# EAGLE board untitled (EAGLE 6.1), part 1 of 2
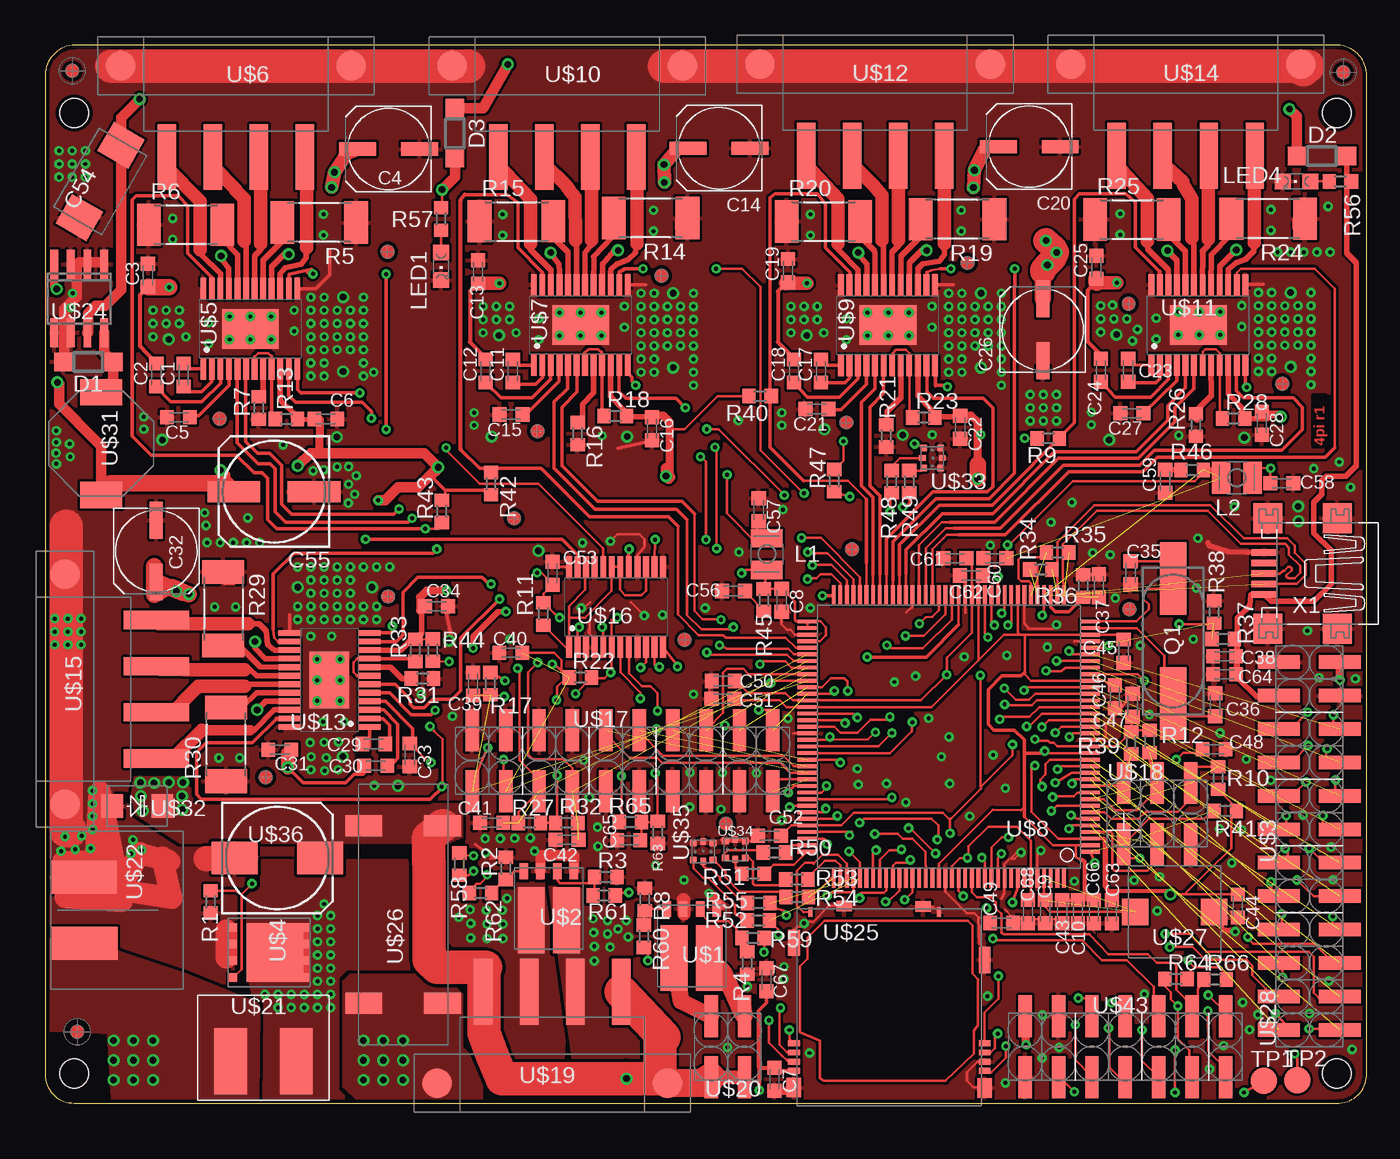
[diagram p0: board, top side]
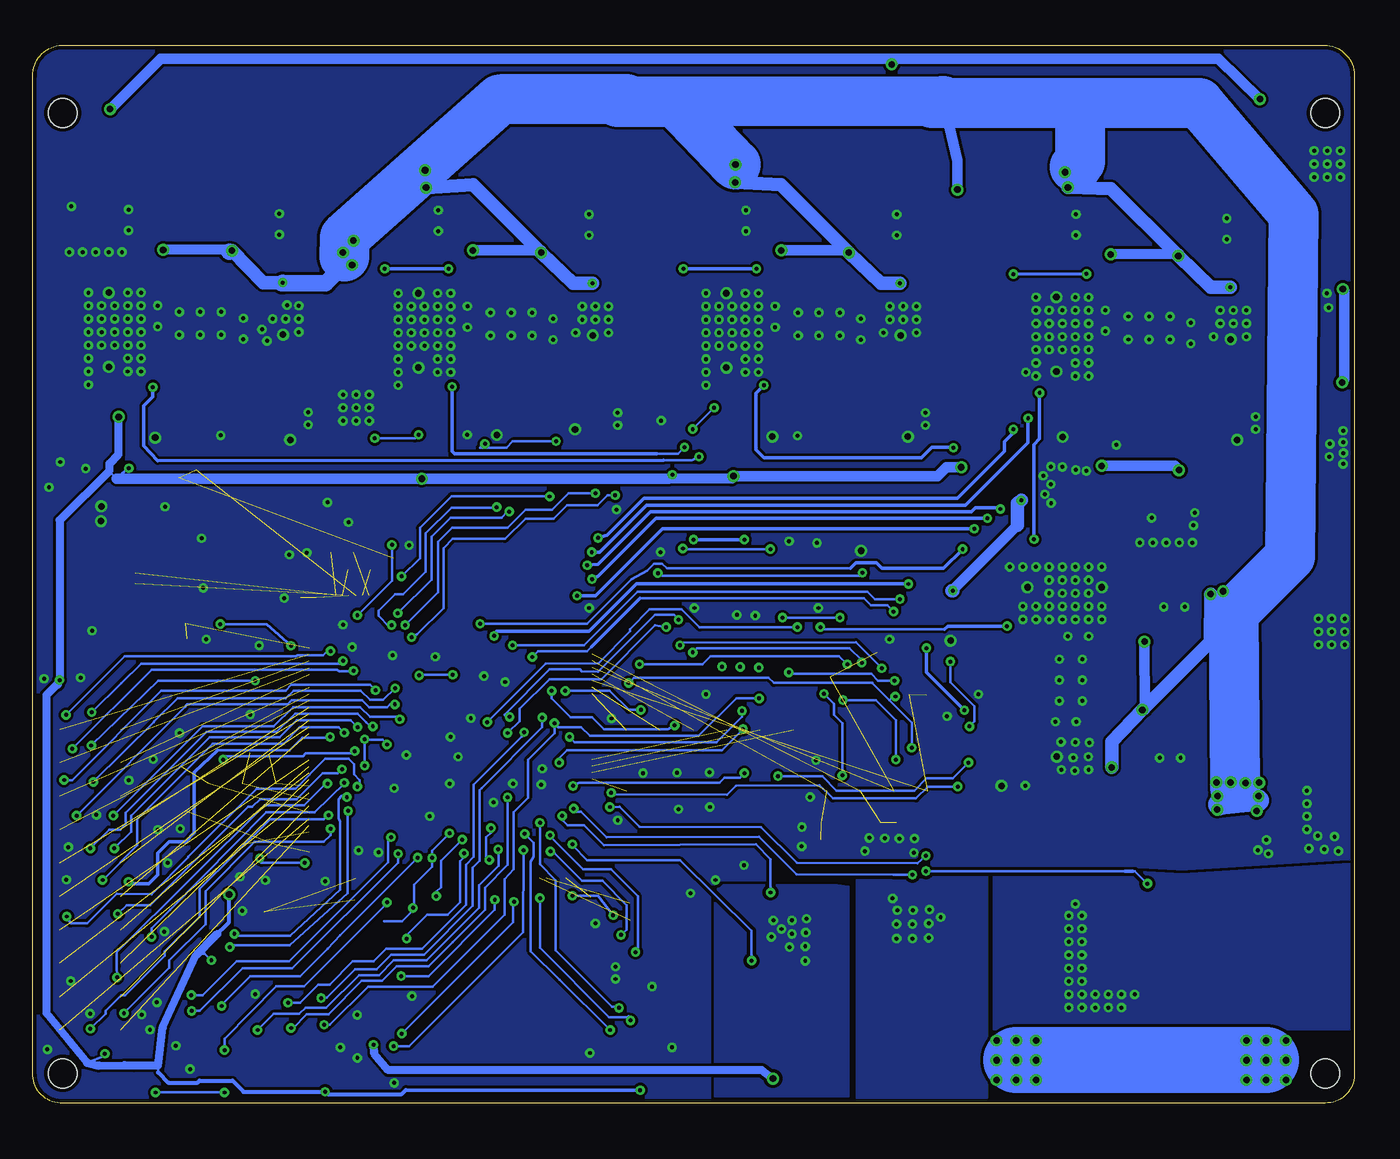
[diagram p1: board, bottom side, seen from below]

Size 100.48 x 80.4 mm. Coordinates in mm from the lower left corner, seen from the top.
Outline: 98.2,0 arc90 100.48,2.08 100.48,78.08 arc90 98.28,80.4 2.28,80.4 arc90 0,78.12 0,2.12 arc90 2.2,0 98.2,0
Copper layers (1*16): Top 0.07mm / dielectric 1.5mm / Bottom 0.07mm
Design rules: minimum track width 8mil, minimum drill 0.3mm, track to track 8mil, track to pad 8mil, pad to pad 8mil, via to via 8mil, smd to smd 0mil, copper to edge 12mil, drill to drill 10mil, minimum pad ring 8mil, minimum via ring 8mil, stop-mask expansion 1.5mil, vias tented up to drill 25mil, thermal gap 8mil
Holes 2.2 mm at 98.2,2.25 2.2,75.25 98.2,75.25 2.2,2.25

## Footprints (pad centres in the part's own frame; a part is rotated, then mirrored left to right if it is on the bottom)
C0603K = smd 1.05 x 1.08: 1 -0.875,0; 2 0.875,0
UD-6,3X7,7_NICHICON = smd 2.8 x 1: + 2.35,0; - -2.35,0
D/7343-31R = smd 2.55 x 2.7: + 3.175,0; - -3.175,0
153CLV-0807 = smd 4 x 1.6: + 3.05,0; - -3.05,0
SOD123 = smd 1.4 x 1.4: A 1.9,0; C -1.9,0
L2825P = smd 1.4 x 2.4: 1 -1.2,0; 2 1.2,0
CHIPLED_0805 = smd 1.2 x 1.2: A 0,-1.05; C 0,1.05
CSM-7X-DU = smd 5.5 x 2: 1 -4.75,0; 2 4.75,0
R0603 = smd 1 x 1.1: 1 -0.85,0; 2 0.85,0
R2512 = smd 1.8 x 3.2: 1 -2.8,0; 2 2.8,0
TP20R = smd 2 x 2: TP 0,0
SUPERSO8 = smd 2.035 x 5: MF1D -1.335,0.91; MF2D 1.335,0.91 | smd 0.65 x 1.2: MF1G -0.645,-2.825; MF1S -1.905,-2.825; MF2G 1.905,-2.825; MF2S 0.645,-2.825
SMD0.1X20 = smd 1.02 x 3.18: P$1 -11.43,2.32; P$2 -11.43,-2.32; P$3 -8.89,2.32; P$4 -8.89,-2.32; P$5 -6.35,2.32; P$6 -6.35,-2.32; P$7 -3.81,2.32; P$8 -3.81,-2.32; P$9 -1.27,2.32; P$10 -1.27,-2.32; P$11 1.27,2.32; P$12 1.27,-2.32; P$13 3.81,2.32; P$14 3.81,-2.32; P$15 6.35,2.32; P$16 6.35,-2.32; P$17 8.89,2.32; P$18 8.89,-2.32; P$19 11.43,2.32; P$20 11.43,-2.32
PQFNFET = smd 4.46 x 4.27: D 0,0.44 | smd 0.65 x 0.65: D1 -1.9,2.75; D2 -0.63,2.75; D3 0.63,2.75; D4 1.9,2.75; G 1.9,-2.75; S1 -1.9,-2.75; S2 -0.63,-2.75; S3 0.63,-2.75
ETSSOP24 = smd 3 x 4.32: EPAD 0,0 | smd 1.635 x 0.44: P01 -3.05,3.575; P02 -3.05,2.925; P03 -3.05,2.275; P04 -3.05,1.625; P05 -3.05,0.975; P06 -3.05,0.325; P07 -3.05,-0.325; P08 -3.05,-0.975; P09 -3.05,-1.625; P10 -3.05,-2.275; P11 -3.05,-2.925; P12 -3.05,-3.575; P13 3.05,-3.575; P14 3.05,-2.925; P15 3.05,-2.275; P16 3.05,-1.625; P17 3.05,-0.975; P18 3.05,-0.325; P19 3.05,0.325; P20 3.05,0.975; P21 3.05,1.625; P22 3.05,2.275; P23 3.05,2.925; P24 3.05,3.575
210-A-126-SMD-4 = smd 2.25 x 2.25: GND0 -8.75,0; GND1 8.75,0 | smd 1.4 x 5: P1 5.25,6.95; P2 1.75,6.95; P3 -1.75,6.95; P4 -5.25,6.95
LQFP144 = smd 1.5 x 0.29: P$1 -10.75,8.75; P$2 -10.75,8.25; P$3 -10.75,7.75; P$4 -10.75,7.25; P$5 -10.75,6.75; P$6 -10.75,6.25; P$7 -10.75,5.75; P$8 -10.75,5.25; P$9 -10.75,4.75; P$10 -10.75,4.25; P$11 -10.75,3.75; P$12 -10.75,3.25; P$13 -10.75,2.75; P$14 -10.75,2.25; P$15 -10.75,1.75; P$16 -10.75,1.25; P$17 -10.75,0.75; P$18 -10.75,0.25; P$19 -10.75,-0.25; P$20 -10.75,-0.75; P$21 -10.75,-1.25; P$22 -10.75,-1.75; P$23 -10.75,-2.25; P$24 -10.75,-2.75; P$25 -10.75,-3.25; P$26 -10.75,-3.75; P$27 -10.75,-4.25; P$28 -10.75,-4.75; P$29 -10.75,-5.25; P$30 -10.75,-5.75; P$31 -10.75,-6.25; P$32 -10.75,-6.75; P$33 -10.75,-7.25; P$34 -10.75,-7.75; P$35 -10.75,-8.25; P$36 -10.75,-8.75; P$73 10.75,-8.75; P$74 10.75,-8.25; P$75 10.75,-7.75; P$76 10.75,-7.25; P$77 10.75,-6.75; P$78 10.75,-6.25; P$79 10.75,-5.75; P$80 10.75,-5.25; P$81 10.75,-4.75; P$82 10.75,-4.25; P$83 10.75,-3.75; P$84 10.75,-3.25; P$85 10.75,-2.75; P$86 10.75,-2.25; P$87 10.75,-1.75; P$88 10.75,-1.25; P$89 10.75,-0.75; P$90 10.75,-0.25; P$91 10.75,0.25; P$92 10.75,0.75; P$93 10.75,1.25; P$94 10.75,1.75; P$95 10.75,2.25; P$96 10.75,2.75; P$97 10.75,3.25; P$98 10.75,3.75; P$99 10.75,4.25; P$100 10.75,4.75; P$101 10.75,5.25; P$102 10.75,5.75; P$103 10.75,6.25; P$104 10.75,6.75; P$105 10.75,7.25; P$106 10.75,7.75; P$107 10.75,8.25; P$108 10.75,8.75 | smd 0.29 x 1.5: P$37 -8.75,-10.75; P$38 -8.25,-10.75; P$39 -7.75,-10.75; P$40 -7.25,-10.75; P$41 -6.75,-10.75; P$42 -6.25,-10.75; P$43 -5.75,-10.75; P$44 -5.25,-10.75; P$45 -4.75,-10.75; P$46 -4.25,-10.75; P$47 -3.75,-10.75; P$48 -3.25,-10.75; P$49 -2.75,-10.75; P$50 -2.25,-10.75; P$51 -1.75,-10.75; P$52 -1.25,-10.75; P$53 -0.75,-10.75; P$54 -0.25,-10.75; P$55 0.25,-10.75; P$56 0.75,-10.75; P$57 1.25,-10.75; P$58 1.75,-10.75; P$59 2.25,-10.75; P$60 2.75,-10.75; P$61 3.25,-10.75; P$62 3.75,-10.75; P$63 4.25,-10.75; P$64 4.75,-10.75; P$65 5.25,-10.75; P$66 5.75,-10.75; P$67 6.25,-10.75; P$68 6.75,-10.75; P$69 7.25,-10.75; P$70 7.75,-10.75; P$71 8.25,-10.75; P$72 8.75,-10.75; P$109 8.75,10.75; P$110 8.25,10.75; P$111 7.75,10.75; P$112 7.25,10.75; P$113 6.75,10.75; P$114 6.25,10.75; P$115 5.75,10.75; P$116 5.25,10.75; P$117 4.75,10.75; P$118 4.25,10.75; P$119 3.75,10.75; P$120 3.25,10.75; P$121 2.75,10.75; P$122 2.25,10.75; P$123 1.75,10.75; P$124 1.25,10.75; P$125 0.75,10.75; P$126 0.25,10.75; P$127 -0.25,10.75; P$128 -0.75,10.75; P$129 -1.25,10.75; P$130 -1.75,10.75; P$131 -2.25,10.75; P$132 -2.75,10.75; P$133 -3.25,10.75; P$134 -3.75,10.75; P$135 -4.25,10.75; P$136 -4.75,10.75; P$137 -5.25,10.75; P$138 -5.75,10.75; P$139 -6.25,10.75; P$140 -6.75,10.75; P$141 -7.25,10.75; P$142 -7.75,10.75; P$143 -8.25,10.75; P$144 -8.75,10.75
TSSOP24 = smd 1.635 x 0.44: P01 -3.05,3.575; P02 -3.05,2.925; P03 -3.05,2.275; P04 -3.05,1.625; P05 -3.05,0.975; P06 -3.05,0.325; P07 -3.05,-0.325; P08 -3.05,-0.975; P09 -3.05,-1.625; P10 -3.05,-2.275; P11 -3.05,-2.925; P12 -3.05,-3.575; P13 3.05,-3.575; P14 3.05,-2.925; P15 3.05,-2.275; P16 3.05,-1.625; P17 3.05,-0.975; P18 3.05,-0.325; P19 3.05,0.325; P20 3.05,0.975; P21 3.05,1.625; P22 3.05,2.275; P23 3.05,2.925; P24 3.05,3.575
SMD0.1X6 = smd 1.02 x 3.18: P1 -2.54,-2.32; P2 -2.54,2.32; P3 0,-2.32; P4 0,2.32; P5 2.54,-2.32; P6 2.54,2.32
SMD0.1 = smd 1.02 x 3.18: P$1 -1.27,2.32; P$2 -1.27,-2.32; P$3 1.27,2.32; P$4 1.27,-2.32
950-D-SMD-2 = smd 2.5 x 5: P$1 -2.5,-1.02; P$2 2.5,-1.02
974-D-SMD-2 = smd 2.5 x 5: P$1 -2.5,-4.45; P$2 2.5,-4.4
SO08 = smd 0.6 x 2.2: 1 -1.905,-2.6; 2 -0.635,-2.6; 3 0.635,-2.6; 4 1.905,-2.6; 5 1.905,2.6; 6 0.635,2.6; 7 -0.635,2.6; 8 -1.905,2.6
SDCARD = smd 0.3 x 0.7: CD -5.975,7.25; COM 3.775,7.25 | smd 0.9 x 0.45: CLK 7.25,-4.835; CMD -7.25,-4.135; DAT0 7.25,-3.435; DAT1 7.25,-2.74; DAT2 -7.25,-2.735; DAT3 -7.25,-3.435; VDD -7.25,-4.835; VSS 7.25,-4.135 | smd 1.1 x 1.5: GND0 7.25,-6.125; GND5 -7.25,-6.1 | smd 0.9 x 2: GND1 7.25,3.6; GND4 -7.25,4.9 | smd 1.2 x 0.8: GND2 2.575,7.65; GND3 -3.425,7.7
FUSEHOLDER = smd 1.6 x 2.8: I0 -6.75,-3; I1 -6.75,3; OUT0 6.75,-3; OUT1 6.75,3
BUTTON = smd 2 x 2: P$1 -3,0; P$2 3,0
INDUCTOR = smd 2 x 3.2: P$1 -3.9,0; P$2 3.9,0
SMX = smd 1.651 x 1.778: P$1 -1.905,0; P$2 1.905,0
OMRONLED = smd 0.5 x 0.5: P1 -0.75,-0.65; P3 0.75,-0.65; P4 0.75,0.65; P6 -0.75,0.65 | smd 0.4 x 0.5: P2 0,-0.75; P5 0,0.75
153CLV-0810 = smd 3.5 x 2.5: + 3.25,0; - -3.25,0
SMD0.1X14 = smd 1.02 x 3.18: P$1 -7.62,2.32; P$2 -7.62,-2.32; P$3 -5.08,2.32; P$4 -5.08,-2.32; P$5 -2.54,2.32; P$6 -2.54,-2.32; P$7 0,2.32; P$8 0,-2.32; P$9 2.54,2.32; P$10 2.54,-2.32; P$11 5.08,2.32; P$12 5.08,-2.32; P$13 7.62,2.32; P$14 7.62,-2.32
USBC = smd 2 x 0.5: 1 3,1.6; 2 3,0.8; 3 3,0; 4 3,-0.8; 5 3,-1.6 | smd 2.2 x 2.3: M1 -2.55,-4.2; M2 -2.55,4.2; M3 2.75,4.2; M4 2.75,-4.2

## Placement (x,y rotation side)
C1  100n  [C0603K]  10.52,55.34 90 top
C2  100n  [C0603K]  8.46,55.34 90 top
C3  100n  [C0603K]  7.82,62.93 90 top
C4  100u  [UD-6,3X7,7_NICHICON]  26.11,72.51 180 top
C5  220n  [C0603K]  10.13,52.13 180 top
C6  220n  [C0603K]  21.33,51.99 0 top
C7  100n  [C0603K]  55.45,1.8 270 top
C8  100n  [C0603K]  56,38.23 270 top
C9  10n  [C0603K]  76.03,14.55 90 top
C10  4.7u  [C0603K]  78.53,14.55 270 top
C11  100n  [C0603K]  35.56,55.64 90 top
C12  100n  [C0603K]  33.49,55.64 90 top
C13  100n  [C0603K]  32.9,63.17 90 top
C14  100u  [UD-6,3X7,7_NICHICON]  51.23,72.57 180 top
C15  220n  [C0603K]  35.42,52.33 180 top
C16  220n  [C0603K]  46.13,51.25 270 top
C17  100n  [C0603K]  58.99,55.64 90 top
C18  100n  [C0603K]  56.93,55.64 90 top
C19  100n  [C0603K]  56.47,63.27 90 top
C20  100u  [UD-6,3X7,7_NICHICON]  74.82,72.69 180 top
C21  220n  [C0603K]  58.68,52.75 180 top
C22  220n  [C0603K]  69.57,51.37 270 top
C23  100n  [C0603K]  82.34,55.69 90 top
C24  100n  [C0603K]  80.28,55.69 90 top
C25  100n  [C0603K]  79.92,63.52 90 top
C26  100u  [UD-6,3X7,7_NICHICON]  75.85,58.78 90 top
C27  220n  [C0603K]  82.62,52.44 180 top
C28  220n  [C0603K]  92.5,51.67 270 top
C29  100n  [C0603K]  24.98,27.29 180 top
C30  100n  [C0603K]  25.13,25.62 180 top
C31  100n  [C0603K]  17.84,26.86 180 top
C32  100u  [UD-6,3X7,7_NICHICON]  8.45,41.95 270 top
C33  220n  [C0603K]  27.72,26.45 270 top
C34  220n  [C0603K]  29.76,37.75 0 top
C35  20p  [C0603K]  82.52,40.3 270 top
C36  20p  [C0603K]  88.95,30.27 90 top
C37  10p  [C0603K]  80.12,39.33 90 top
C38  10p  [C0603K]  89.67,33.95 180 top
C39  10u  [C0603K]  32.53,31.85 90 top
C40  10u  [C0603K]  35.41,34.22 180 top
C41  10u  [C0603K]  33.95,21.3 180 top
C42  10u  [C0603K]  39.68,20 180 top
C43  100n  [C0603K]  77.33,14.55 270 top
C44  100n  [C0603K]  90.67,14.97 270 top
C45  100n  [C0603K]  82,34.35 270 top
C46  100n  [C0603K]  81.33,30.88 90 top
C47  100n  [C0603K]  82.67,30.23 270 top
C48  100n  [C0603K]  88.88,26.9 180 top
C49  100n  [C0603K]  72.73,13.68 0 top
C50  100n  [C0603K]  51.55,32.08 180 top
C51  100n  [C0603K]  51.53,30.73 180 top
C52  100n  [C0603K]  55.08,20.32 0 top
C53  100n  [C0603K]  38.58,40.27 270 top
C54  47u  [D/7343-31R]  4.19,70.05 60 top
C55  120uf  [153CLV-0807]  17.4,46.48 180 top
C56  4.7u  [C0603K]  52.33,38.92 0 top
C57  10u  [C0603K]  54.25,45.1 270 top
C58  10u  [C0603K]  94.03,47.1 180 top
C59  4.7u  [C0603K]  85.15,47.25 90 top
C60  100n  [C0603K]  72.2,41.4 180 top
C61  100n  [C0603K]  69.17,41.4 180 top
C62  100n  [C0603K]  70.42,40.1 180 top
C63  10u  [C0603K]  81.1,14.53 270 top
C64  4.7u  [C0603K]  89.67,32.6 0 top
C65  10p  [C0603K]  44.38,19.98 0 top
C66  10u  [C0603K]  79.73,14.55 270 top
C67  10u  [C0603K]  54.85,9.38 90 top
C68  100n  [C0603K]  74.73,14.55 270 top
D1  1N5819HW  [SOD123]  3.28,56.33 180 top
D2  1N5819HW  [SOD123]  97.08,71.97 0 top
D3  1N5819HW  [SOD123]  31.15,73.72 270 top
L1  10u  [L2825P]  54.88,41.73 90 top
L2  10u  [L2825P]  90.6,47.52 180 top
LED1  [CHIPLED_0805]  30.1,63.6 180 top
LED4  [CHIPLED_0805]  95.15,70.05 90 top
Q1  [CSM-7X-DU]  85.75,35.12 90 top
R1  33k  [R0603]  12.58,15.29 270 top
R2  33k  [R0603]  35.03,17.84 90 top
R3  33k  [R0603]  42.62,17.18 0 top
R4  33k  [R0603]  53.38,10.64 270 top
R5  0.05r  [R2512]  20.84,66.93 180 top
R6  0.05r  [R2512]  10.68,66.77 0 top
R7  0R  [R0603]  16.24,52.83 270 top
R8  33k  [R0603]  45.6,15.47 270 top
R9  100k  [R0603]  76.28,50.52 180 top
R10  100k  [R0603]  89.17,24.7 270 top
R11  33k  [R0603]  37.88,37.17 270 top
R12  100k  [R0603]  83.98,27.48 90 top
R13  100k  [R0603]  18.35,51.99 0 top
R14  0.05r  [R2512]  46.04,67.27 180 top
R15  0.05r  [R2512]  35.83,67.01 0 top
R16  0R  [R0603]  40.48,50.87 270 top
R17  4.7k  [R0603]  33.85,31.88 90 top
R18  100k  [R0603]  43.35,52.23 0 top
R19  0.05r  [R2512]  69.38,67.17 180 top
R20  0.05r  [R2512]  59.17,67.01 0 top
R21  0R  [R0603]  63.96,50.71 270 top
R22  4.7k  [R0603]  40.7,32.35 0 top
R23  100k  [R0603]  66.81,52.11 0 top
R24  0.05r  [R2512]  92.98,67.22 180 top
R25  0.05r  [R2512]  82.62,67.16 0 top
R26  0R  [R0603]  87.49,51.53 270 top
R27  4.7k  [R0603]  36.83,21.3 0 top
R28  100k  [R0603]  90.36,52.02 0 top
R29  0.05r  [R2512]  13.54,37.57 270 top
R30  0.05r  [R2512]  13.75,27.25 90 top
R31  0R  [R0603]  28.69,32.26 0 top
R32  4.7k  [R0603]  39.65,21.3 180 top
R33  100k  [R0603]  28.13,34.41 90 top
R34  39R  [R0603]  75.7,40.55 0 top
R35  39R  [R0603]  76.98,41.85 0 top
R36  6.8k  [R0603]  78.92,39.3 90 top
R37  47k  [R0603]  89.58,35.27 0 top
R38  68k  [R0603]  88.88,37.33 270 top
R39  100k  [R0603]  82.55,27.38 270 top
R40  100k  [R0603]  54.35,53.73 180 top
R41  100k  [R0603]  89.73,22.2 0 top
R42  100k  [R0603]  33.9,47.08 270 top
R43  100k  [R0603]  30.15,44.98 90 top
R44  100k  [R0603]  29.47,34.42 270 top
R45  1r  [R0603]  54.65,38.23 90 top
R46  1r  [R0603]  87.2,48.12 0 top
R47  1k  [R0603]  60,47.3 90 top
R48  1k  [R0603]  64.35,47.23 90 top
R49  1k  [R0603]  65.7,47.23 90 top
R50  1k  [R0603]  55.45,19.02 0 top
R51  1k  [R0603]  53.83,17.43 0 top
R52  1k  [R0603]  54.23,13.88 0 top
R53  1k  [R0603]  57.15,16.98 0 top
R54  1k  [R0603]  57.18,15.65 0 top
R55  1k  [R0603]  54.25,15.2 0 top
R56  1k  [R0603]  98.48,70.05 180 top
R57  4.7k  [R0603]  30.1,67.2 270 top
R58  1k  [R0603]  31.5,18.15 90 top
R59  220r  [R0603]  53.83,12.55 180 top
R60  220r  [R0603]  45.53,12.68 270 top
R61  220r  [R0603]  42.5,15.78 0 top
R62  220r  [R0603]  33.1,15.97 180 top
R63  33k  [R0603]  46.58,20.57 90 top
R64  4.7k  [R0603]  85.98,9.43 0 top
R65  100k  [R0603]  44.5,21.35 0 top
R66  4.7k  [R0603]  88.95,9.4 0 top
TP1  TPTP20R  [TP20R]  92.65,1.68 0 top
TP2  TPTP20R  [TP20R]  95.2,1.73 0 top
U$1  IPG20N04S4L-11  [SUPERSO8]  49.15,11.93 180 top
U$2  IPG20N04S4L-11  [SUPERSO8]  38.3,14.8 180 top
U$3  SMD.1X20  [SMD0.1X20]  96.12,22.07 90 top
U$4  IRFH6200  [PQFNFET]  17.02,11.45 270 top
U$5  A4982  [ETSSOP24]  15.6,58.85 90 top
U$6  210-A-126-SMD  [210-A-126-SMD-4]  14.5,78.85 180 top
U$7  A4982  [ETSSOP24]  40.72,59.14 90 top
U$8  SAM3U4E  [LQFP144]  68.7,27.85 180 top
U$9  A4982  [ETSSOP24]  64.07,59.12 90 top
U$10  210-A-126-SMD  [210-A-126-SMD-4]  39.7,78.85 180 top
U$11  A4982  [ETSSOP24]  87.67,59.13 90 top
U$12  210-A-126-SMD  [210-A-126-SMD-4]  63.1,78.95 180 top
U$13  A4982  [ETSSOP24]  21.62,32.16 180 top
U$14  210-A-126-SMD  [210-A-126-SMD-4]  86.73,78.95 180 top
U$15  210-A-126-SMD  [210-A-126-SMD-4]  1.5,31.45 270 top
U$16  AD5206  [TSSOP24]  43.4,37.7 90 top
U$17  SMD.1X20  [SMD0.1X20]  43.9,26.02 0 top
U$18  SMD.1X6  [SMD0.1X6]  84.55,22 0 top
U$19  210-A-126-SMD  [210-A-126-SMD-4]  38.55,1.5 0 top
U$20  SMD.1  [SMD0.1]  51.9,4.28 180 top
U$21  950-D-SMD-DS-2  [950-D-SMD-2]  16.6,4.2 0 top
U$22  974-D-SMD-2  [974-D-SMD-2]  7.4,14.65 270 top
U$23  GFUD  [FIDUCIAL_G10]  2.43,5.42 0 top
U$24  LM2594  [SO08]  2.58,61.15 180 top
U$25  SDCARD  [SDCARD]  64.17,7.28 0 top
U$26  FUSE  [FUSEHOLDER]  27.22,14.32 90 top
U$27  BUTTON  [BUTTON]  85.88,14.53 180 top
U$28  SMD.1  [SMD0.1]  96.12,6.83 90 top
U$29  GFUD  [FIDUCIAL_G10]  2.05,78.45 0 top
U$30  GFUD  [FIDUCIAL_G10]  98.7,78.35 0 top
U$31  100uH  [INDUCTOR]  4.25,50.12 270 top
U$32  FM4004  [SMX]  7,22.57 180 top
U$33  OMRONLED  [OMRONLED]  67.45,49.02 270 top
U$34  OMRONLED  [OMRONLED]  52.48,19.27 0 top
U$35  OMRONLED  [OMRONLED]  50.03,19.12 0 top
U$36  VISHAYCAP  [153CLV-0810]  17.65,18.62 0 top
U$37  LFUD  [FIDUCIAL_L10]  16.75,24.75 0 top
U$38  LFUD  [FIDUCIAL_L10]  26.07,38.5 0 top
U$39  LFUD  [FIDUCIAL_L10]  35.65,44.45 0 top
U$40  LFUD  [FIDUCIAL_L10]  48.62,35.2 0 top
U$41  LFUD  [FIDUCIAL_L10]  26.05,64.7 90 top
U$42  LFUD  [FIDUCIAL_L10]  13.25,52.02 90 top
U$43  SMD.1X14  [SMD0.1X14]  82.12,4.28 0 top
U$44  LFUD  [FIDUCIAL_L10]  61.35,42.1 0 top
U$45  LFUD  [FIDUCIAL_L10]  82.42,37.52 0 top
U$46  LFUD  [FIDUCIAL_L10]  51.78,21.23 0 top
U$47  LFUD  [FIDUCIAL_L10]  46.85,62.88 90 top
U$48  LFUD  [FIDUCIAL_L10]  37.43,51.05 90 top
U$49  LFUD  [FIDUCIAL_L10]  60.93,51.73 90 top
U$50  LFUD  [FIDUCIAL_L10]  70.12,63.85 90 top
U$51  LFUD  [FIDUCIAL_L10]  82.38,60.75 0 top
U$52  LFUD  [FIDUCIAL_L10]  94.05,54.67 0 top
X1  [USBC]  95.7,40.25 180 top

## Library data of the parts
C1-C68 L1 L2 R1-R4 R7-R13 R16-R18 R21-R23 R26-R28 R31-R66 U$36 = rcl
D1-D3 = diode
LED1 LED4 = led
Q1 = crystal; OC_FARNELL: unknown; OC_NEWARK: unknown
R5 R6 R14 R15 R19 R20 R24 R25 R29 R30 = resistor
TP1 TP2 = testpad
U$1-U$22 U$25-U$28 U$31-U$35 U$43 X1 = untitled
U$23 U$29 U$30 U$37-U$42 U$44-U$52 = dicons
U$24 = LM2594

## Nets
A: U$16.P12
B: U$16.P10
BEDOUT: U$4.D U$4.D1 U$4.D2 U$4.D3 U$4.D4 U$21.P$2
CS0: U$8.P$93 U$16.P05
CS1: U$8.P$118 U$43.P$9
CS2: U$8.P$116 U$43.P$10
CS3: U$8.P$100 U$43.P$8
DFSDM: R34.1 U$8.P$41
DFSDP: R35.1 U$8.P$42
DHSDM: R34.2 U$8.P$38 X1.2
DHSDP: R35.2 U$8.P$37 X1.3
HOTEND1: U$2.MF2D U$19.P3
HOTEND2: U$2.MF1D U$19.P2
I2CCLK: R64.1 U$8.P$132 U$43.P$12
I2CDATA: R66.1 U$8.P$130 U$43.P$11
LED0: R50.2 U$8.P$107
LED1: R51.2 U$8.P$108
LED2: R53.2 U$8.P$110
LED6: R47.1 U$8.P$47
LED7: R48.1 U$8.P$46
LED8: R49.1 U$8.P$45
MA0: U$8.P$61 U$11.P05
MA1: U$8.P$59 U$11.P06
MA2: R9.1 U$8.P$62 U$11.P23
MA3: U$8.P$58 U$11.P11
MA4: U$8.P$57 U$11.P14
MB0: U$8.P$54 U$13.P06
MB1: U$8.P$53 U$13.P05
MB2: R44.2 U$8.P$98 U$13.P23
MB3: U$8.P$55 U$13.P11
MB4: U$8.P$56 U$13.P14
MISO: U$8.P$87 U$43.P$5
MOSI: U$8.P$88 U$16.P07 U$43.P$6
MOTGND: C3.2 C4.- C5.2 C6.2 C7.2 C8.2 C9.1 C10.2 C13.2 C14.- C15.2 C16.2 C19.2 C20.- C21.2 C22.2 C25.2 C26.- C27.2 C28.2 C31.2 C32.- C33.2 C34.2 C35.2 C36.2 C37.2 C38.2 C39.2 C40.2 C41.2 C42.2 C43.2 C44.2 C45.2 C46.1 C47.1 C48.1 C49.2 C50.2 C51.2 C52.1 C53.1 C54.- C55.- C56.1 C57.1 C58.1 C59.1 C60.2 C61.2 C62.2 C63.2 C64.1 C65.1 C66.2 C67.2 C68.2 D1.A LED1.C LED4.C R1.2 R2.2 R3.2 R4.2 R5.1 R6.1 R7.2 R8.1 R14.1 R15.1 R16.2 R19.1 R20.1 R21.2 R24.1 R25.1 R26.2 R29.1 R30.1 R31.2 R36.2 R38.1 R63.1 U$1.MF1S U$1.MF2S U$2.MF1S U$2.MF2S U$3.P$18 U$3.P$19 U$4.S1 U$4.S2 U$4.S3 U$5.EPAD U$5.P13 U$5.P24 U$6.GND0 U$6.GND1 U$7.EPAD U$7.P13 U$7.P24 U$8.P$18 U$8.P$33 U$8.P$43 U$8.P$52 U$8.P$60 U$8.P$75 U$8.P$90 U$8.P$126 U$8.P$135 U$8.P$140 U$9.EPAD U$9.P13 U$9.P24 U$10.GND0 U$10.GND1 U$11.EPAD U$11.P13 U$11.P24 U$12.GND0 U$12.GND1 U$13.EPAD U$13.P13 U$13.P24 U$14.GND0 U$14.GND1 U$15.GND0 U$15.GND1 U$16.P03 U$16.P04 U$16.P09 U$16.P13 U$16.P16 U$16.P21 U$16.P24 U$17.P$1 U$17.P$3 U$17.P$5 U$17.P$7 U$17.P$10 U$17.P$12 U$17.P$14 U$17.P$16 U$17.P$18 U$18.P5 U$22.P$1 U$24.1 U$24.2 U$24.3 U$24.5 U$24.6 U$25.COM U$25.GND0 U$25.GND1 U$25.GND2 U$25.GND3 U$25.GND4 U$25.GND5 U$25.VSS U$27.P$1 U$32.P$2 U$33.P4 U$33.P5 U$33.P6 U$34.P4 U$34.P5 U$34.P6 U$35.P4 U$35.P5 U$35.P6 U$36.- U$43.P$2 U$43.P$3 X1.5 X1.M1 X1.M2 X1.M3 X1.M4
MX0: U$5.P05 U$8.P$71
MX1: U$5.P06 U$8.P$70
MX2: R43.1 U$5.P23 U$8.P$72
MX3: U$5.P11 U$8.P$69
MX4: U$5.P14 U$8.P$68
MY0: U$7.P05 U$8.P$92
MY1: U$7.P06 U$8.P$89
MY2: R42.1 U$7.P23 U$8.P$77
MY3: U$7.P11 U$8.P$49
MY4: U$7.P14 U$8.P$48
MZ0: U$8.P$66 U$9.P05
MZ1: U$8.P$65 U$9.P06
MZ2: R40.1 U$8.P$67 U$9.P23
MZ3: U$8.P$64 U$9.P11
MZ4: U$8.P$63 U$9.P14
N$2: R61.2 U$8.P$103
N$3: R62.2 U$8.P$102
N$4: R58.2 U$8.P$101
N$5: R11.2 U$16.P01 U$16.P15 U$16.P18 U$16.P19 U$16.P22
N$6: R5.2 U$5.P17
N$7: R6.2 U$5.P20
N$8: R60.2 U$8.P$106
N$9: C1.2 U$5.P01
N$10: C1.1 U$5.P02
N$11: C2.1 U$5.P03
N$12: R13.1 U$5.P07 U$5.P09
N$13: TP1.TP U$8.P$137
N$14: R15.2 U$7.P20
N$15: C5.1 U$5.P04
N$16: R7.1 U$5.P08
N$20: U$5.P15 U$6.P4
N$21: U$5.P19 U$6.P2
N$23: C11.2 U$7.P01
N$24: U$5.P22 U$6.P1
N$27: R1.1 R58.1 U$4.G
N$28: C23.2 U$11.P01
N$29: R29.2 U$13.P17
N$30: R30.2 U$13.P20
N$31: C23.1 U$11.P02
N$33: C29.2 U$13.P01
N$34: R4.1 R59.2 U$1.MF1G
N$35: C29.1 U$13.P02
N$36: C24.1 U$11.P03
N$37: R28.1 U$11.P07 U$11.P09
N$38: C17.2 U$9.P01
N$39: C27.1 U$11.P04
N$40: C18.1 U$9.P03
N$41: R26.1 U$11.P08
N$43: R21.1 U$9.P08
N$44: U$9.P19 U$12.P2
N$45: U$9.P15 U$12.P4
N$46: U$11.P19 U$14.P2
N$48: U$11.P15 U$14.P4
N$49: R8.2 R60.1 U$1.MF2G
N$50: R3.1 R61.1 U$2.MF1G
N$54: R33.1 U$13.P07 U$13.P09
N$56: U$5.P18 U$6.P3
N$58: U$13.P15 U$15.P4
N$60: R14.2 U$7.P17
N$61: C30.1 U$13.P03
N$64: C11.1 U$7.P02
N$65: C12.1 U$7.P03
N$67: R2.1 R62.1 U$2.MF2G
N$68: C15.1 U$7.P04
N$69: R16.1 U$7.P08
N$71: U$1.MF2D U$20.P$4
N$72: U$11.P18 U$14.P3
N$74: U$7.P19 U$10.P2
N$75: R31.1 U$13.P08
N$76: R19.2 U$9.P17
N$77: U$1.MF1D U$20.P$2
N$78: U$7.P15 U$10.P4
N$79: U$13.P19 U$15.P2
N$80: R18.1 U$7.P07 U$7.P09
N$81: C17.1 U$9.P02
N$84: U$13.P22 U$15.P1
N$88: R59.1 U$8.P$105
N$89: U$7.P22 U$10.P1
N$90: U$9.P18 U$12.P3
N$92: U$9.P22 U$12.P1
N$98: U$7.P18 U$10.P3
N$103: U$13.P18 U$15.P3
N$105: R20.2 U$9.P20
N$109: R23.1 U$9.P07 U$9.P09
N$129: R24.2 U$11.P17
N$130: R25.2 U$11.P20
N$139: U$11.P22 U$14.P1
N$154: D1.C U$24.8 U$31.P$1
N$156: C54.+ D2.C D3.C U$24.7
N$157: C56.2 R45.1
N$159: C59.2 R46.1
N$160: R48.2 U$33.P2
N$161: R50.1 U$34.P1
N$162: R51.1 U$34.P2
N$172: R53.1 U$34.P3
N$173: R55.1 U$35.P2
N$174: R54.1 U$35.P3
N$175: R52.1 U$35.P1
N$176: R49.2 U$33.P3
N$177: R47.2 U$33.P1
N$178: LED4.A R56.2
N$179: LED1.A R57.2
NRST: R39.2 U$8.P$11 U$18.P2
NRSTB: C9.2 U$8.P$141 U$27.P$2
PA0: R54.2 U$8.P$109
PA2: R52.2 U$8.P$113
PB9: U$3.P$16 U$8.P$31
PB10: U$3.P$15 U$8.P$30
PB14: U$3.P$14 U$8.P$29
PB15: U$8.P$97 U$17.P$20
PB17: U$3.P$12 U$8.P$26
PB18: U$3.P$11 U$8.P$25
PB19: U$3.P$10 U$8.P$24
PB20: U$3.P$9 U$8.P$23
PB21: U$3.P$7 U$8.P$21
PB22: U$3.P$6 U$8.P$20
PB23: U$3.P$5 U$8.P$19
PB24: U$3.P$4 U$8.P$15
PB25: U$3.P$3 U$8.P$14
PB26: U$3.P$2 U$8.P$13
PB27: U$3.P$1 U$8.P$12
PB28: U$8.P$10 U$28.P$4
PB29: U$8.P$8 U$28.P$3
PB30: U$8.P$6 U$28.P$2
PB31: U$8.P$5 U$28.P$1
PC1: R55.2 U$8.P$112
PC14: U$3.P$13 U$8.P$28
PC19: R37.1 R38.2 U$8.P$32
PC21: U$3.P$8 U$8.P$22
REFA: U$13.P12 U$16.P02
REFE: U$11.P12 U$16.P14
REFX: U$5.P12 U$16.P23
REFY: U$7.P12 U$16.P20
REFZ: U$9.P12 U$16.P17
RX: U$8.P$133 U$43.P$13
SCK: U$8.P$91 U$16.P08 U$43.P$7
SDBUS0: U$8.P$117 U$25.CMD
SDBUS1: U$8.P$115 U$25.CLK
SDBUS2: U$8.P$119 U$25.DAT0
SDBUS3: U$8.P$121 U$25.DAT1
SDBUS4: U$8.P$123 U$25.DAT2
SDBUS5: U$8.P$128 U$25.DAT3
SDCD: U$8.P$111 U$25.CD
T0: C39.1 R17.1 U$8.P$82 U$17.P$2
T1: C40.1 R22.1 U$8.P$80 U$17.P$4
T2: C41.1 R27.1 U$8.P$78 U$17.P$6
T3: C42.1 R32.1 U$8.P$79 U$17.P$8
TCK: R12.1 U$8.P$9 U$18.P4
TD0: U$8.P$4 U$18.P3
TDI: R41.1 U$8.P$1 U$18.P1
TMS: R10.1 U$8.P$7 U$18.P6
TST: U$8.P$138
TX: U$8.P$134 U$43.P$14
V+: C2.2 C3.1 C4.+ C12.2 C13.1 C14.+ C18.2 C19.1 C20.+ C24.2 C25.1 C26.+ C30.2 C31.1 C32.+ D3.A R57.1 U$5.P16 U$5.P21 U$7.P16 U$7.P21 U$9.P16 U$9.P21 U$11.P16 U$11.P21 U$13.P16 U$13.P21 U$19.GND1 U$19.P1 U$19.P4 U$20.P$1 U$20.P$3 U$26.OUT0 U$26.OUT1 U$32.P$1 U$36.+ U$43.P$1
VBG: C37.1 R36.1 U$8.P$39
VCC: C6.1 C7.1 C16.1 C22.1 C28.1 C34.1 C44.1 C47.2 C49.1 C50.1 C52.2 C55.+ C57.2 C58.2 C61.1 C63.1 C67.1 C68.1 L1.2 L2.1 R9.2 R10.2 R12.2 R13.2 R18.2 R23.2 R28.2 R33.2 R39.1 R40.2 R41.2 R42.2 R43.2 R44.1 R64.2 R66.2 TP2.TP U$3.P$20 U$5.P10 U$7.P10 U$8.P$3 U$8.P$17 U$8.P$51 U$8.P$85 U$8.P$104 U$8.P$127 U$8.P$139 U$9.P10 U$11.P10 U$13.P10 U$24.4 U$25.VDD U$31.P$2 U$43.P$4
VCORE: C10.1 C43.1 C45.1 C46.2 C48.2 C51.1 C62.1 C66.1 U$8.P$2 U$8.P$16 U$8.P$27 U$8.P$34 U$8.P$44 U$8.P$50 U$8.P$86 U$8.P$125
VDDANA: C8.1 C53.2 L1.1 R11.1 R17.2 R22.2 R27.2 R32.2 R45.2 U$8.P$73 U$8.P$74 U$8.P$76 U$16.P06
VDDUTMI: C60.1 L2.2 R46.2 U$8.P$40
VDET: C65.2 R63.2 R65.2 U$8.P$99
VIN: U$19.GND0 U$21.P$1 U$22.P$2 U$26.I0 U$26.I1
VMOTDET: C33.1 R65.1 U$13.P04
VREG: C21.1 U$9.P04
VUSB: C38.1 C64.2 D2.A R37.2 R56.1 U$3.P$17 X1.1
W: U$16.P11
X+: U$8.P$81 U$17.P$15
X-: U$8.P$96 U$17.P$9
XTAL1: C35.1 Q1.2 U$8.P$36
XTAL2: C36.1 Q1.1 U$8.P$35
Y+: U$8.P$83 U$17.P$17
Y-: U$8.P$95 U$17.P$11
Z+: U$8.P$84 U$17.P$19
Z-: U$8.P$94 U$17.P$13

## Tracks (layer width: path | path; a pad name or v marks a point on that pad's centre or on a via)
A  (via drill 0.3)
  Top 0.203: U$16.P12 48.08,33.25 v48.08,33.17
B  (via drill 0.3)
  Top 0.203: 45.25,33.17 v45.28,33.1 45.68,33.5 U$16.P10
BEDOUT  (via drill 0.3)
  Top 0.61: U$4.D4 U$4.D3 U$4.D2 | U$4.D2 U$4.D1 | U$4.D 18.82,13.35 U$4.D2
  other vias: 20.7,14.25 20.7,13.25 21.7,14.25 21.7,13.25 20.7,12.25 20.7,11.25 21.7,12.25 21.7,11.25 20.7,10.25 20.7,9.25 21.7,10.25 21.7,9.25 16.7,8.25 21.2,15.12 17.7,8.25 17.7,7.25 18.7,8.25 18.7,7.25 19.7,8.25 19.7,7.25 20.7,8.25 20.7,7.25 21.7,8.25 21.7,7.25
  pour Top (isolate 0.254, rank 2, no thermals): 16.55,5.35 16.2,0.4 16.8,-0.2 24.05,0.3 24.45,1.2 24.95,6.7 27.55,9.3 27.55,13.2 27.45,15.1 27.45,17.95 27.55,18.35 13.8,18.35 13.2,18.25 14.05,17.4 14.35,16.4 14.9,15.55 15.2,11.35
  pour Bottom (isolate 0.254, rank 2): 0.3,18.2 13.07,17.38 27.4,18.2 27.4,5.6 0.25,5.6 0.25,18.25
CS0  (via drill 0.3)
  Top 0.203: U$16.P05 42.4,35.95 v42.35,36.17 | U$8.P$93 64.23,26.6 65.9,28.27 65.9,28.93 v65.92,28.95
  Bottom 0.203: 42.35,35.9 v42.35,36.17 42.3,36.15 49.78,36.15 51.15,37.52 53.58,37.52 55.08,36.02 55.08,35.88 57.48,33.42 61.48,33.4 v65.92,28.95
CS1  (via drill 0.3)
  Top 0.203: 67.65,18.98 v67.7,18.98 65.78,20.9 v65.65,20.9 | U$8.P$118 64.45,18.05 64.67,18.27 65.75,18.27 v65.78,18.48 | v72.05,12.5 72.17,12.5 72.38,12.38 78.88,12.38 80.33,10.85 82.23,10.85 84.3,8.82 84.3,8.16 arc28 U$43.P$9
  Bottom 0.203: v65.65,20.9 65.65,20.55 66,20.2 66,18.7 v65.78,18.48 | v67.7,18.98 67.7,18.68 68,18.38 68,15.25 68.92,14.32 70.5,14.32 72.17,12.65 72.05,12.53 v72.05,12.5
CS2  (via drill 0.3)
  Top 0.203: U$8.P$116 63.48,18.05 63.48,18.48 64.2,19.2 65.03,19.2 v65.1,19.27 | v83.4,5.55 83.4,3.22 U$43.P$10
  Bottom 0.203: v83.4,5.55 82.17,6.78 80.23,6.78 79.75,7.25 78.17,7.25 75.67,9.72 74.15,9.72 73.05,10.85 70.55,10.85 66.55,14.85 66.55,16.55 65.05,18.05 65.05,19.23 v65.1,19.27 64.9,19.07
CS3  (via drill 0.3)
  Top 0.203: v80.85,5.7 80.92,5.62 80.92,2.73 81.77,1.89 82.09,1.89 82.12,1.93 U$43.P$8 | U$8.P$100 64.25,23.1 v64.38,23.23
  Bottom 0.203: v80.85,5.7 80.7,5.7 79.65,6.75 78,6.75 75.48,9.28 73.92,9.28 72.8,10.4 70.38,10.4 68.55,12.22 66.08,14.68 66.08,16.38 64.38,18.1 v64.38,23.23 64.33,23.18
DFSDM  (1 unrouted)
  Top 0.203: U$8.P$41 75.45,40.8 R34.1
DFSDP  (1 unrouted)
  Top 0.203: R35.1 75.75,41.92 75.75,41.5 75.73,41.48 74.17,41.48 74,41.3 74,39.9 74.23,39.67 74.8,39.67 74.95,39.52 U$8.P$42
DHSDM  (2 unrouted)
  Top 0.203: X1.2 95.15,39.45 95.85,40.15 95.85,40.98 95,41.83 95,42.38 94.45,42.92 91.12,42.92 88.6,45.45 79.78,45.45 76.95,42.62 76.95,40.25 | U$8.P$38 76.95,40.25 | 76.95,40.25 R34.2
DHSDP  (2 unrouted)
  Top 0.203: X1.3 92.73,40.23 93.88,40.23 94.12,40.48 94.23,40.48 94.53,40.77 94.65,40.77 94.78,40.65 94.78,40.5 94.38,40.1 94.38,40 94.5,39.88 95,39.88 95.42,40.3 95.42,40.83 94.58,41.67 94.58,42.2 94.28,42.5 90.92,42.5 88.4,45.02 79.95,45.02 77.38,42.45 77.38,42.3 | 77.45,41.93 R35.2 77.38,42.3 | U$8.P$37 77.45,39.5 77.38,39.58 77.38,42.3
HOTEND1  (via drill 0.3)
  other vias: 35.1,15.55 32.3,14.7 32.35,13.65 32.35,12.55 31.45,14.12 33.55,14.65 33.6,13.6 33.6,12.5 34.75,14.65 34.8,13.6 34.8,12.5
  pour Top (isolate 0.254, rank 3, no thermals): 38.05,16.75 34.55,16.75 33.7,17.6 30.8,17.6 30.5,17.3 30.5,12.4 31.45,11.45 33.7,11.45 34.35,10.8 34.35,5 35.45,3.38 36.15,3.38 39.43,3.12 39.88,13.72
  pour Bottom (isolate 0.254, no thermals): 27.95,17.75 27.95,0.4 37.8,0.3 37.8,17.65
HOTEND2  (via drill 0.3)
  other vias: 41.65,14 41.7,12.95 41.75,11.9 41.75,10.8 42.75,12.85 42.95,11.85 43.55,13.22 42.75,13.88 44.18,13.88 44.33,12.62
  pour Top (isolate 0.254, rank 2, no thermals): 38.35,16.45 44.18,16.6 47.08,13 45.35,4.65 46.05,2.7 44.25,2.67 42.88,2.45 40.18,2.95 39.18,10.3
  pour Bottom (isolate 0.254, no thermals): 38.45,16.45 38.45,0.5 48.6,0.5 48.6,16.55 39.35,16.55
I2CCLK  (via drill 0.3)
  Top 0.203: v71.23,18.65 71.45,18.35 U$8.P$132 | R64.1 85.03,9 85.6,8.43 85.6,7.9 v86.12,7.38 86.12,4.88 86.98,4.03 86.98,2.19 U$43.P$12
  Bottom 0.203: v71.23,18.65 77.1,12.75 78.05,11.72 80.15,9.62 83.95,9.62 86.12,7.45 v86.12,7.38 86.15,7.3
I2CDATA
  Top 0.203: U$8.P$130 70.45,16.02 70.83,15.65 71.92,15.65 72.3,15.28 72.3,14.78 72.7,14.38 72.7,12.93 72.88,12.82 79.38,12.82 80.83,11.32 83.85,11.32 84.53,10.65 85.78,10.65 86,10.43 86,8.62 86.73,7.89 86.99,7.92 | 86.99,7.92 87.63,8 87.63,8.63 R66.1 | 86.99,7.92 87.26,7.66 arc-95 U$43.P$11
LED0
  Top 0.203: U$8.P$107 56.9,19.6 56.73,19.43 56.73,19.2 R50.2
LED1
  Top 0.203: U$8.P$108 57.58,18.75 56.95,18.12 55.38,18.12 R51.2
LED2
  Top 0.203: U$8.P$110 60.45,18.07 60.1,18.43 59.28,18.43 58.05,17.2 R53.2
LED6  (via drill 0.3)
  Top 0.203: v72.45,40.02 U$8.P$47 | v61.18,46.1 60,46.42 R47.1
  Bottom 0.203: v61.18,46.1 61.38,46.12 68.65,46.12 71.05,43.73 71.05,41.42 v72.45,40.02 72.53,40.1
LED7  (via drill 0.3)
  Top 0.203: U$8.P$46 72.95,37.38 v72.73,37.23 | v64.25,44.95 64.25,46.15 R48.1
  Bottom 0.203: v64.25,44.95 64.4,44.95 64.85,44.5 68.7,44.5 70.17,43.02 70.17,39.77 v72.73,37.23
LED8  (via drill 0.3)
  Top 0.203: U$8.P$45 73.45,36.5 v73.2,36.33 | v65.2,45.3 65.23,45.25 65.7,45.55 R49.1
  Bottom 0.203: v73.2,36.33 73.38,36.2 74.2,37.02 74.2,37.42 72.95,38.67 72.33,38.67 70.62,40.38 70.62,43.3 68.65,45.25 64.98,45.25 v65.2,45.3
MA0
  Top 0.203: U$8.P$61 65.45,40.25
  Top 0.254: U$11.P05 86.7,54.35 85.35,53 85.35,51.9 82.95,49.5 76.75,49.5 72.08,44.8 68.23,44.8 65.45,42.05 65.45,40.25
MA1
  Top 0.203: 68.78,44.15 68.2,44.15 66.45,42.4 U$8.P$59
  Top 0.254: U$11.P06 87.35,54.3 85.9,52.85 85.9,51.8 83.1,49 77.05,49 72.23,44.15 68.78,44.15
MA2
  Top 0.203: U$8.P$62 64.95,40.1 | 78.26,51.71 78.26,51.66 R9.1
  Top 0.254: 84.72,63.22 82.89,65.05 82.89,68.46 82.15,69.1 78.65,69.1 78.26,68.71 78.26,51.71 72.03,45.45 67.98,45.45 64.95,42.45 64.95,40.1 | 84.72,62.23 84.75,62.23
  Top 0.305: 84.72,63.22 84.72,62.23
  Top 0.406: 84.75,62.23 U$11.P23
MA3
  Top 0.203: 69.08,43.67 68.48,43.67 66.95,42.15 U$8.P$58
  Top 0.254: 69.08,43.67 72.62,43.67 77.42,48.48 83.23,48.48 84.35,49.6 94.03,49.6 95.6,51.17 95.6,52.9 94.9,53.6 91.1,53.6 90.57,54.13 90.57,56.13 90.6,56.13
  Top 0.406: 90.6,56.13 U$11.P11
MA4
  Top 0.203: U$11.P14 90.6,63.1 90.9,63.4 96.55,63.4 98.05,61.9 98.05,49.8 | U$8.P$57 67.45,42.08 68.3,42.92 68.58,43.17 69.42,43.17
  Top 0.254: 69.42,43.17 73.03,43.17 77.85,48 83.48,48 84.55,49.08 97.33,49.08 98.05,49.8
MB0  (via drill 0.3)
  Top 0.203: U$8.P$54 68.95,36.75 66.75,34.55 64.35,34.55 v64,34.8 | v34.55,38.3 34.4,38.15
  Top 0.254: U$13.P06 26.62,31.83 27.75,30.7 27.75,30.3 28,30.05 28.8,30.05 29.45,30.7 30.95,30.7 31.6,31.35 31.6,35.35 v34.55,38.3
  Bottom 0.203: v64,34.8 58.55,34.8 54.5,38.85 37,38.85 36.45,38.3 v34.55,38.3
MB1  (via drill 0.3)
  Top 0.203: 69.45,36.35 U$8.P$53
  Top 0.254: v62.5,33.9 67,33.9 69.45,36.35 | U$13.P05 26.17,31.18 27.82,29.5 29.32,29.5 v29.65,29.85 | v35.03,37.35 35.05,37.4
  Top 0.406: v32.53,34.58 32.55,35.45 34.45,37.35 v35.03,37.35
  Bottom 0.203: v35.03,37.35 35.5,37.83 36.75,37.83 37.28,38.35 54.3,38.35 | v62.5,33.9 62.08,34.33 58.33,34.33 57.99,34.66
  Bottom 0.254: 54.3,38.35 57.99,34.66 | v32.53,34.58 32.55,32.75 v29.65,29.85
MB2  (via drill 0.3)
  Top 0.203: v30.15,24.05 30.2,24.1 30.2,27.65 29.57,28.27 29.57,28.3 v29.25,28.62 | R44.2 30.57,33.52 v30.7,33.55 | U$8.P$98 56.95,24.1 v56.5,23.57
  Top 0.254: 17.59,29.22 15.75,27.39 12.24,27.39 11.5,26.65 11.5,23.45 11.85,23.1 29.25,23.1 30.2,24 v30.15,24.05 | U$13.P23 18.58,29.23 U$13.P23
  Top 0.305: 17.59,29.22 U$13.P23
  Bottom 0.203: v30.15,24.05 32.43,24.05 33.33,23.15 39.65,23.15 40.65,24.15 47,24.12 47.7,23.43 56.45,23.45 v56.5,23.57 | v30.7,33.55 30.7,32 28.88,30.18 28.88,29 v29.25,28.62
MB3  (via drill 0.3)
  Top 0.203: U$8.P$55 68.45,37.15 66.8,35.5 v65.4,35.5
  Top 0.254: 25.3,35.07 U$13.P11 | 25.3,35.07 26.67,35.07 27.2,35.6 27.2,38.83 28.32,39.95 33.23,39.95 33.68,39.5 v33.9,39.45 | U$13.P11 25.29,35.08 25.3,35.07
  Bottom 0.254: v33.9,39.45 54.58,39.45 58.18,35.85 65.2,35.85 v65.4,35.5
MB4  (via drill 0.3)
  Top 0.203: 17.34,36.02 17.41,35.35 17.71,35.05 | U$8.P$56 67.95,37.45 67.45,36.95 66.98,36.92 v66.48,36.42
  Top 0.254: 17.34,36.02 17.34,36.91 17.34,40.21 18.93,41.8 29.47,41.8 v29.77,42.1 29.8,42.05 30.03,41.97 | 17.71,35.05 18.6,35.05 18.6,35.06 U$13.P14
  Bottom 0.203: v66.48,36.42 58.35,36.42 54.95,39.83 53.78,40.48 53.25,41 52.62,41 52.28,40.65 38.33,40.65
  Bottom 0.254: 38.33,40.65 37.88,41.08 36.35,41.08 35.93,40.65 31.22,40.65 v29.77,42.1
MISO  (via drill 0.3)
  Top 0.203: U$8.P$87 61.45,29.6 v61.75,29.3 | v78.55,7.97 79.55,7.97 79.55,6.63 U$43.P$5
  Bottom 0.203: v61.75,29.3 61.75,28.55 66.35,23.92 | 66.35,23.92 66.5,23.77 | v78.55,7.97 78.15,8 75.98,10.18 74.35,10.18 73.25,11.28 70.73,11.28 67.03,14.97 67.03,17.9 66.5,18.43 66.5,23.78 66.35,23.92
MOSI  (via drill 0.3)
  Top 0.203: U$8.P$88 60.55,29.1 v60.83,28.88 | 43.7,34.08 U$16.P07 43.73,32.75 45.28,31.2 45.28,30.77 v45.25,30.75 | v78.33,5.95 78.33,3.27 79.59,2.01 U$43.P$6
  Bottom 0.203: v60.83,28.88 60.5,28.9 | v78.33,5.95 77.9,5.95 75,8.85 70.08,8.85 64.62,14.3 64.62,17.02 63.93,17.77 63.93,22.1 62.83,23.2 62.83,26.07 60.8,28.1 60.8,28.85 v60.83,28.88 | v45.25,30.75 45.28,30.77 46.98,30.77 49.85,27.9 58.1,27.9 58.78,28.57 60.53,28.57 v60.83,28.88 | v60.83,28.88 60.55,28.6
MOTGND  (via drill 0.3, 0.5)
  Top 0.203: U$8.P$126 68.45,16.05 70.08,14.43 70.65,14.43 71,14.07 71,14.05 70.95,14.07 71.03,12.07 71.42,11.68 U$25.GND1 | 78.25,35.1 U$8.P$33 | 69.95,37.25 U$8.P$52 69.95,40.15 | U$8.P$60 65.95,37.7 65.8,37.55 65.75,37.55 65.5,37.3 | v76.9,36.35 76.6,36.05 74.8,36.05 74.45,36.45 U$8.P$43 | 81.45,29.55 C47.1 80.65,28.7 80.65,27.85 80.4,27.6 U$8.P$18 | 41.38,36 41.35,35.98 41.35,35.73 41.78,35.3 U$16.P04 41.78,35.33 41.4,35.7 41.4,36.55 | 41.43,38.08 40.9,37.55 | v45.55,37.05 44.53,38.08 | C53.1 38.95,40.75 U$16.P24 | 69.95,40.15 69.95,40.17 69.92,40.2 69.92,40.12 69.95,40.15 | 73.85,13.97 75.62,13.97 | 75.62,13.97 75.65,13.95 | U$8.P$140 75.45,18.95 v75.7,19.2 | 73.45,18.55 73.7,18.55 v74.2,19.05 74.15,19 73.8,19 72.95,18.15 U$8.P$135 72.95,15.93 72.7,15.53 | 75.62,13.97 77.38,13.97 77.65,13.7 C43.2 | 50.53,31.7 50.53,30.85 C51.2 | C52.1 54.12,19.93 U$34.P4 | U$25.GND2 66.85,14.9 66.88,14.93 67.53,14.93 U$25.COM | U$16.P16 45.05,41.65 45.55,42.3 45.55,42.85 45.18,43.23 43.5,43.23 v42.98,42.7 | X1.5 91.53,41.85 91.5,41.88 | R2.2 33.85,18.55 34.08,18.65 32.68,19.68 | U$4.S3 14.17,12.93 13.77,13.1 | U$1.MF2S 48.58,14.68 48.58,14.4 | U$1.MF1S 51.28,14.97 51.5,14.97 | U$8.P$90 56.9,28.1 | U$17.P$1 32.67,29.64 32.7,29.68 32.7,29.73 | U$8.P$75 57.03,35.6 56.65,35.98 56.4,35.98 56,36.38 C8.2 | U$25.GND3 59.6,14.97 58.4,13.78 57.85,13.78 57.48,13.4 57.18,13.4 56.95,13.18 56.95,12.2 U$25.GND4 | 73.03,14.68 73.85,13.78 73.65,13.78 73.58,13.7 | U$25.VSS 70.89,3.14 70.1,2.35 70.1,1.68 70.58,1.2 71.38,1.2 U$25.GND0
  Top 0.254: U$5.P13 20.55,61.88 21.63,62.96 21.63,64.86 | 22.9,66.13 22.9,66.82 R5.1 | 43.56,49.76 45.99,50.29 | 48.74,67.22 48,67.12 48,66.43 | 45.65,62.18 44.27,62.18 | 67.67,62.18 69.05,62.18 | 71.4,66.43 71.4,67.12 72.14,67.22 | 91.22,62.23 92.6,62.23 | 94.95,66.48 94.95,67.17 95.69,67.28 | U$13.P13 18.57,37.1 | 14.32,39.45 13.63,39.45 13.52,40.19 | 30.46,37.44 30.99,35.01 | R36.2 C37.2 | 1.43,56.38 1.42,56.38 D1.A | U$34.P6 52.48,19.93 U$34.P5 53.23,20.02 U$34.P4
  Top 0.406: U$34.P6 51.55,20.02 | 91.5,41.88 91.28,41.88 89.95,41.9 88.5,42.38 88.4,42.6 | v90.48,13.03 89.58,13.18 U$27.P$1
  Top 0.61: C7.2 56.68,0.9 U$25.GND5 | 51.5,14.97 50.73,15.68
  Top 0.813: 37.6,17.7 37.65,17.7 37.65,18.85 40.2,18.85 40.2,17.7 | 1.43,56.38 1.43,60.33 2.38,61.27 2.38,63.67 2.6,63.9 4.15,63.9
  Top 1.016: 48.58,14.4 48.55,15.45
  Top 1.676: 5.62,16.2 7.2,19 9.42,18.38 8.9,18.66 9.6,15.6 5.62,16.2 | 5.62,16.2 3.9,16.35 | 5.62,16.2 4.15,23.65 3.85,18.43 1.35,18.32 5.83,15.35 1.55,15.65 | 13.77,13.1 13.77,11.05
  Top 1.93: 12.25,18.55 U$36.-
  Top 2.54: 1.9,20.7 1.6,20.7 1.6,43.85 | 5.05,78.8 32.2,78.8 | 47.1,78.8 96,78.8 95.65,78.55
  other vias: 14.01,59.78 15.6,59.78 17.19,59.78 17.19,58.04 15.6,58.04 14.01,58.04 12.42,59.31 12.42,57.72 18.1,50.02 9.68,67.24 9.68,65.66 21.16,67.56 21.16,65.97 18.93,60.26 18.93,58.67 7.5,52.16 7.5,51.21 8.9,50.4 22.18,50.62 8.2,60.25 9.2,60.25 10.2,60.25 8.2,59.25 9.4,58.05 9.2,59.25 10.2,59.25 8.2,58.25 10.7,58.25 20.2,61.25 21.2,61.25 22.65,61.25 20.2,60.25 21.2,59.25 22.2,58.25 23.2,57.25 22.65,55.6 24.97,55.55 24.2,55.25 24.2,56.25 24.2,57.25 24.2,58.25 24.2,59.25 23.2,59.25 22.2,60.25 23.2,60.25 24.2,60.25 24.2,61.25 21.2,60.25 22.2,59.25 23.2,58.25 22.2,57.25 21.2,57.25 20.2,59.25 20.2,58.25 21.2,58.25 20.2,57.25 20.2,56.25 21.2,56.25 20.2,55.25 21.2,55.25 42.35,50.72 44.25,50.65 45.3,55.55 47.75,55.9 46.3,55.55 45.3,56.55 45.3,57.55 46.3,56.55 49.3,54.55 46.3,57.55 47.3,57.55 49.3,55.55 49.3,56.55 48.3,57.55 49.3,57.55 49.3,58.55 44.03,58.97 48.3,58.55 49.3,59.55 49.3,61.55 49.3,60.55 48.3,59.55 47.3,58.55 45.3,58.55 46.26,67.86 46.3,58.55 45.3,59.55 47.3,59.55 47.75,61.55 48.3,60.55 47.3,60.55 46.3,59.55 46.26,66.27 46.3,60.55 46.3,61.55 45.3,61.55 45.3,60.55 44.03,60.56 42.29,60.08 40.7,60.08 39.11,60.08 40.7,58.34 39.11,58.34 37.52,59.61 37.52,58.02 34.5,58.35 34.3,59.55 35.8,58.55 35.3,59.55 34.78,67.54 34.78,65.96 35.3,60.55 34.3,60.55 33.3,60.55 33.3,59.55 33.3,58.55 32.6,52.46 32.6,51.51 33.95,50.65 62.51,60.08 64.1,60.08 65.69,60.08 65.69,58.34 64.1,58.34 62.51,58.34 60.92,59.61 60.92,58.02 67.45,50.8 58.18,67.54 58.18,65.96 69.66,67.86 69.66,66.27 67.43,60.56 67.43,58.97 56,52.46 56,51.51 59.25,51.2 65.2,50.77 56.7,60.55 57.7,60.55 58.7,60.55 56.7,59.55 57.9,58.35 57.7,59.55 58.7,59.55 56.7,58.55 59.2,58.55 68.7,61.55 69.7,61.55 71.15,61.55 68.7,60.55 69.7,59.55 70.7,58.55 71.7,57.55 71.15,55.9 72.7,54.55 72.7,55.55 72.7,56.55 72.7,57.55 72.7,58.55 72.7,59.55 71.7,59.55 70.7,60.55 71.7,60.55 72.7,60.55 72.7,61.55 69.7,60.55 70.7,59.55 71.7,58.55 70.7,57.55 69.7,57.55 68.7,59.55 68.7,58.55 69.7,58.55 68.7,57.55 68.7,56.55 69.7,56.55 68.7,55.55 69.7,55.55 86.16,60.13 87.75,60.13 89.34,60.13 89.34,58.39 87.75,58.39 86.16,58.39 84.47,59.66 84.47,58.07 86.2,50.75 81.73,67.59 81.73,66.01 93.21,67.91 93.21,66.32 90.98,60.61 90.98,59.02 79.55,52.51 79.55,51.56 80.9,50.4 91.17,50.58 80.25,60.6 81.15,60.65 82.67,57.92 80.25,59.6 81.45,58.4 81.25,59.6 82.25,59.6 80.25,58.6 83.05,58.8 92.25,61.6 93.25,61.6 94.7,61.6 92.25,60.6 93.25,59.6 94.25,58.6 95.25,57.6 94.7,55.95 96.25,54.6 96.25,55.6 96.25,56.6 96.25,57.6 96.25,58.6 96.25,59.6 95.25,59.6 94.25,60.6 95.25,60.6 96.25,60.6 96.25,61.6 93.25,60.6 94.25,59.6 95.25,58.6 94.25,57.6 93.25,57.6 92.25,59.6 92.25,58.6 93.25,58.6 92.25,57.6 92.25,56.6 93.25,56.6 92.25,55.6 93.25,55.6 20.67,30.56 20.67,32.15 20.67,33.74 22.41,33.74 22.41,32.15 22.41,30.56 21.14,28.97 22.73,28.97 28.58,31.07 13.21,26.23 14.79,26.23 12.89,37.71 14.48,37.71 20.19,35.48 21.78,35.48 30.96,29.4 25.02,24.13 26.82,24.1 30.7,35.15 20.2,25.32 20.22,26.32 20.15,27.4 21.25,25.25 22.62,26.32 21.38,26.25 21.2,27.43 22.27,25.32 22.3,27.45 19.2,36.75 19.2,37.75 19.2,39.2 20.2,36.75 21.2,37.75 22.2,38.75 23.2,39.75 24.85,39.2 26.2,40.75 25.2,40.75 24.2,40.75 23.2,40.75 22.2,40.75 21.2,40.75 21.2,39.75 20.2,38.75 20.2,39.75 20.2,40.75 19.2,40.75 20.2,37.75 21.2,38.75 22.2,39.75 23.2,38.75 23.2,37.75 21.2,36.75 22.2,36.75 22.2,37.75 23.2,36.75 24.2,36.75 24.2,37.75 25.2,36.75 25.2,37.75 42.29,58.34 99.25,46.8 90.42,45.33 76.2,34.65 58.18,37.62 37.5,41.98 61.75,25.4 46.95,37.1 50.18,37.62 1.5,20.25 2.28,19.27 2.78,20.3 3.45,19.35 1.2,19.15 6.53,18.95 6.67,20 7.33,19.23 3.6,20.8 3.6,21.8 3.6,22.75 3.6,23.75 37.2,19.15 42,20.98 33.45,20.1 33.48,19.02 54.08,25.07 34.6,20.1 36.88,20.15 75.83,6.7 75.8,3.42 61.83,24.2 76.9,51.85 75.9,51.85 76.9,52.85 76.9,53.85 75.9,52.85 74.9,51.85 74.9,52.85 75.9,53.85 74.9,53.85 87.65,42.92 83.95,29.52 89.33,28.12 97.6,9.28 96.12,6.8 91.58,5.58 83.58,8.28 92.2,6.72 84.55,14.6 83.28,34.77 87.3,35.25 87.53,39.15 68.73,27.82 16.3,42.6 15.3,42.6 14.3,42.6 13.3,42.6 12.3,42.6 0.73,35.83 1.72,34.83 2.73,34.83 2.73,35.83 2.73,36.83 1.72,36.83 0.73,36.83 1.72,35.83 0.73,34.83 0.85,51.1 1.85,50.1 2.08,61.55 1.95,60.45 0.82,49.4 23.52,46.27 95.3,44.23 95.28,45.35 98.4,48.73 96.45,48.23 40.93,26.05 49,22.5 35.7,20.12 1.05,71.38 2.05,70.38 3.05,70.38 3.05,71.38 3.05,72.38 2.05,72.38 1.05,72.38 2.05,71.38 1.05,70.38 23.07,47.02 12.22,43.9 22.2,48.35 21.18,48.12 23.07,48.38 20.38,48.05 23.05,45.6 23.65,47.67 15.4,44.48 56,21.5 42.03,19.5 41.38,23.25 48.58,16.95 78.08,45.65 76.48,44.15 71.88,42.4 99.38,4.08 35.33,35.25 97.92,16.98 97.78,19.45 63.98,24.27 68.78,24.27 65.45,22.85 51.38,22.32 51.88,4.22 67.17,29.25 64.58,32 68.15,26.32 49.3,31.07 49.03,25.12 72.08,26.45 73.12,34.02 69.88,33.92 0.85,48.58 0.85,50.23 1.9,49.12 66.17,32.45 80.98,41.67 81.38,38.38 79.65,41.83 95.98,35.9 91.33,26.12 93.17,24.52 95.65,21.9 91.05,7.65 88.53,2.58 52.7,51.88 12.12,44.87 56.1,45.11 99.62,32.25 56.48,29.23 51.5,25.1 96.85,32.33 50.48,15.95 89.28,20.85 90.98,20.77 82.8,16.93 53.4,8.85 84.73,17.2 73,1.52 57.7,13.65 71.65,8.12 73,23.93 70.3,21.8 46.4,18.07 40.75,37.62 78.25,16.85 89.6,4.35 52.75,41.88 77.1,4.22 90.23,18.25 58.12,3.8 40.85,42.58 97.55,68.15 93.7,64.67 95.7,64.67 96.7,64.67 97.7,64.67 94.7,64.67 56.18,10.35 56.18,9.43
  pour Bottom (rank 6): 0.2,80.15 100.3,80.15 100.3,0.05 0.4,0.05 0.4,60.25 0.4,68.25
  pour Top (rank 6): 0,80.35 100.3,80.35 100.3,-0.05 0.2,-0.05 0.2,55.95 0.2,63.75
  pour Top (isolate 0.254, rank 2, no thermals): 10.2,60.75 10.2,58.25 12.2,56.25 92.7,56.25 93.7,57.25 93.7,60.25 92.2,61.75 11.2,61.75
  pour Top (isolate 0.254, rank 2, no thermals): 19.7,38.75 18.2,37.25 18.2,28.25 19.7,26.75 23.2,26.75 23.7,27.25 23.7,36.75 21.7,38.75
MX0  (via drill 0.3)
  Top 0.203: U$8.P$71 60.45,39.5 59.78,40.17 58.95,40.17 58.65,39.88 58,39.88 v57.95,39.83
  Top 0.254: v27.9,44.45 27.6,44.15 18.27,44.15 17.47,44.95 17.47,48.23 17.1,48.6 16.18,48.6 14.6,50.17 14.6,55.4 14.62,55.4 U$5.P05
  Bottom 0.254: v27.9,44.45 53.1,44.45 57.5,40.05 v57.95,39.83
MX1  (via drill 0.3)
  Top 0.203: U$8.P$70 60.95,39.75 59.8,40.9 58.35,40.9 v58.33,40.88
  Top 0.254: v26.9,45.15 26.5,44.75 18.72,44.75 17.97,45.5 17.97,48.48 17.07,49.38 16.15,49.38 15.25,50.27 15.25,55.35 15.27,55.35 U$5.P06
  Bottom 0.254: v58.33,40.88 57.5,40.95 53.5,44.95 29.1,44.95 28.8,45.25 27,45.25 v26.9,45.15
MX2  (via drill 0.3)
  Top 0.203: 59.9,38.55 U$8.P$72 | v28.9,43.65 29.9,43.65 R43.1
  Top 0.254: 12.67,62.77 10.84,64.6 10.84,68.21 10.1,68.95 6.9,68.95 6.61,68.66 6.61,50.69 8.05,49.25 14.52,49.25 15.88,47.9 16.47,47.9 16.9,47.48 16.9,44.35 17.6,43.65 28.7,43.65 28.8,43.55 28.9,43.55 v28.9,43.65 | v59.1,38.55 59.9,38.55
  Top 0.305: 12.67,62.77 U$5.P23
  Bottom 0.254: v28.9,43.65 52.6,43.65 57.7,38.55 v59.1,38.55
MX3  (via drill 0.3)
  Top 0.203: U$8.P$69 61.45,39.83 59.48,41.8 58.05,41.8 v57.98,41.88
  Top 0.254: U$5.P11 18.52,53.78 19.05,53.25 24.1,53.25 24.8,52.55 v24.8,52.05
  Bottom 0.254: v57.98,41.88 57.4,41.85 53.8,45.45 29.55,45.45 24.8,50.2 v24.8,52.05
MX4  (via drill 0.3)
  Top 0.203: 57.53,42.92 v57.5,42.95 58.98,42.95 61.95,39.98 U$8.P$68
  Top 0.254: v20.36,63.02 19.97,63.12 20.25,63.39 18.55,62.99 U$5.P14 | 25.92,61.62 v25.92,63.01 | 25.92,61.62 25.92,61.37 25.93,61.39 | 25.93,61.62 25.93,61.8 | v25.93,51.2 25.93,61.39 | 25.93,61.39 25.93,61.62 | 25.93,61.62 25.92,61.62
  Bottom 0.254: v25.92,63.01 v20.36,63.02 | v57.5,42.95 56.8,43.15 54,45.95 30.18,45.95 26.6,49.52 26.6,50.27 25.93,50.95 v25.93,51.2 25.9,51.17
MY0  (via drill 0.3)
  Top 0.203: 48.8,44.35 48.8,37.08 49.9,36 52.25,36 v52.33,36.17 | U$8.P$92 63.35,27.1 v64.38,28.12
  Top 0.254: 48.8,44.35 48,45.15 41.8,45.15 38.7,48.25 38.7,53.3 39.7,54.3 39.7,55.7 39.76,55.76 U$7.P05
  Bottom 0.203: v52.33,36.17 53.15,36.3 57.23,32.23 61.2,32.23 63.48,29.95 63.48,29.02 v64.38,28.12
MY1  (via drill 0.3)
  Top 0.203: 49.35,44.8 49.35,37.4 49.98,36.77 51.53,36.77 v51.38,36.73 | U$8.P$89 60.03,28.6 60.48,28.15 61.75,28.15 62.75,29.15 64.17,29.15 v64.23,29.35
  Top 0.254: 49.35,44.8 48.4,45.75 42,45.75 39.3,48.45 39.3,52.9 40.45,54.05 40.45,55.75 40.41,55.79 U$7.P06
  Bottom 0.203: v64.23,29.35 64.29,29.27 64.6,29.52 61.18,32.98 58.88,32.98 58.75,32.8 57.5,32.77 53.15,37.1 51.73,37.1 v51.38,36.73
MY2
  Top 0.203: 31.6,49.67 31.6,51.42 | 33.95,48.25 R42.1 | U$8.P$77 57.08,34.6 56.3,35.38 51.75,35.38 51.55,35.55 49.68,35.55 48.1,37.15 48.1,43.85
  Top 0.254: 37.77,63.16 35.94,65 35.94,68.41 35.1,69.05 31.9,69.05 | 48.1,43.85 47.4,44.55 41.4,44.55 37.7,48.25 33.95,48.25 33.02,48.25 31.6,49.67 | 37.77,62.18 U$7.P23
  Top 0.305: 37.77,63.16 37.77,62.18 | 31.9,69.05 31.6,68.65 31.6,49.67
MY3  (via drill 0.3)
  Top 0.203: 48.65,52.85 v48.68,52.85 | v50.3,51.23 51.2,51.23 56.35,46.08 v56.2,46.2 | v71.67,35.4 71.73,35.45 71.45,35.7 U$8.P$49
  Top 0.254: 48.65,52.85 47.95,53.55 44.15,53.55 43.62,54.08 43.62,56.08 U$7.P11
  Bottom 0.203: v48.68,52.85 v50.3,51.23 | v71.67,35.4 71.25,35.62 69.25,37.62 69.25,42.17 68.55,42.88 64.58,42.88 63.03,44.42 60.88,44.42 59.85,45.45 57.53,45.45 56.78,46.2 v56.2,46.2
MY4  (via drill 0.3)
  Top 0.203: v51.02,63.41 52.99,63.41 54.38,62.02 54.38,49.62 57.73,46.27 57.58,46.3 v57.7,46.35 | v72.17,36.33 71.95,36.58 U$8.P$48
  Top 0.254: v45.46,63.41 44.67,63.41 44.07,63.41 43.62,63.16 43.62,62.18 U$7.P14
  Bottom 0.203: 72.12,36.52 v72.17,36.33 69.67,38.83 69.67,42.65 68.6,43.73 64.38,43.73 63.03,45.08 61,45.08 59.73,46.35 v57.7,46.35
  Bottom 0.254: v51.02,63.41 v45.46,63.41
MZ0
  Top 0.203: U$8.P$66 62.95,40.15
  Top 0.254: 62.95,40.15 62.95,46.02 62.05,46.92 62.05,53.25 63.1,54.3 U$9.P05
MZ1
  Top 0.203: U$8.P$65 63.45,40.2
  Top 0.254: 63.45,40.2 63.45,46.17 62.7,46.92 62.7,52.9 63.75,53.95 U$9.P06
MZ2
  Top 0.203: U$8.P$67 62.45,41.05 | 55.11,49.86 55.11,53.63 R40.1 | 57.67,47.3 61.03,47.3 62.45,45.88
  Top 0.254: 62.45,41.05 62.45,45.88 | 57.67,47.3 55.11,49.86 55.11,68.81 55.5,69.1 58.7,69.1 59.34,68.31 59.34,65 61.17,63.16 61.17,62.2 U$9.P23
MZ3
  Top 0.203: U$8.P$64 63.95,40.2
  Top 0.254: 67.02,56.08 67.02,54.08 67.55,53.55 71.35,53.55 72.05,52.85 72.05,46.85 71.65,46.45 67.5,46.45 63.95,42.9 63.95,40.2 | 67.02,56.08 U$9.P11 | 67.02,56.08
MZ4  (via drill 0.3)
  Top 0.203: U$8.P$63 64.45,39.75 | 68.07,63.41 67.37,63.31 67.02,63.16
  Top 0.254: v68.86,63.41 68.07,63.41 | 67.02,63.16 67.02,62.18 | 73.72,63.37 73.7,63.35 73.7,63.45 73.72,63.43 v73.72,63.41 | 73.72,63.37 73.75,63.4 | 73.72,63.37 73.72,62.12 73.7,62.1 73.7,47.85 71.78,45.92 67.73,45.92 64.45,42.65 64.45,39.75 | 67.02,62.18 U$9.P14 | 67.02,62.18
  Bottom 0.254: v73.72,63.41 v68.86,63.41
N$2  (via drill 0.3)
  Top 0.203: U$8.P$103 59.95,21.6 v60.23,21.82 | R61.2 43.5,16 v44.38,16
  Bottom 0.203: v60.23,21.82 60.2,21.48 59.83,21.1 58.55,21.1 57.05,19.6 45.5,19.65 44.38,18.52 v44.38,16
N$3  (via drill 0.3)
  Top 0.203: U$8.P$102 59.33,22.1 v59.35,22.38 | R62.2 32.8,16.65 33.05,16.65 33.53,17.12 v33.6,17.35
  Bottom 0.203: v33.6,17.35 35.03,17.35 42.4,17.38 45.25,20.23 56.85,20.2 58.8,22.15 59.38,22.15 59.33,22.4 v59.35,22.38
N$4  (via drill 0.3)
  Top 0.203: U$8.P$101 56.7,22.6 v56.6,22.5 | v32.58,18.8 31.68,18.82 R58.2
  Bottom 0.203: v56.6,22.5 56.58,22.48 55.85,22.5 54.35,21 45.1,20.98 42.38,18.25 33.23,18.23 v32.58,18.8
N$5
  Top 0.203: U$16.P15 45.68,38.92 45.35,38.6 44.1,38.6 43.7,39 43.7,40.17 U$16.P18 U$16.P19 43.08,38.92 41.05,36.9 39.83,36.9 | U$16.P22 41.05,40.12 41.05,39 39.83,37.77 39.83,36.9 | 39.83,36.9 U$16.P01 39.8,34.4 R11.2
N$6
  Top 0.406: U$5.P17 16.55,63.1 16.55,64.07 18.04,65.55 R5.2
N$7
  Top 0.406: R6.2 13.48,65.65 14.65,64.48 14.65,63.18 14.62,63.16 U$5.P20
N$8  (via drill 0.3)
  Top 0.203: U$8.P$106 59.23,20.1 59.4,19.93 v59.45,19.68 | v45.83,10.82 45.83,11.53 R60.2
  Bottom 0.203: v45.83,10.82 45.83,13.07 51.28,18.45 58.33,18.45 59.45,19.57 v59.45,19.68 59.38,19.57 59.3,19.5
N$9
  Top 0.254: U$5.P01 10.52,55.8 C1.2
N$10
  Top 0.254: C1.1 10.52,54.38 | C1.1 10.52,54.38 | U$5.P02 12.67,54.82 11.9,54.05 10.85,54.05 C1.1
N$11
  Top 0.254: U$5.P03 13.32,54.72 11.9,53.3 9.54,53.3 C2.1
N$12
  Top 0.203: 15.92,56.72 16.2,57 16.95,57 17.2,56.75
  Top 0.254: 15.92,56.72 U$5.P07 | 17.2,56.75 17.2,55.8 U$5.P09 17.22,51.87 R13.1
N$13  (via drill 0.3)
  Top 0.203: U$8.P$137 73.92,16.3 v73.55,15.25 | v91.15,0.8 92.55,1.57 TP1.TP | v85.9,0.8 v85.9,4.03
  Bottom 0.203: v85.9,0.8 v91.15,0.8 | v85.9,4.03 85.9,4.9 81.98,8.88 79.85,8.88 73.55,15.18 v73.55,15.25
N$14
  Top 0.203: R15.2 38.58,67
  Top 0.406: 38.58,67.07 38.58,67 38.58,65.85 39.75,64.69 39.75,63.08 39.76,63.04 U$7.P20
N$15
  Top 0.254: U$5.P04 13.97,54.57 11.65,52.25 11.21,52.25 C5.1
N$16
  Top 0.406: U$5.P08 16.57,53.52 16.45,53.75 15.95,53.39 R7.1
N$20
  Top 0.406: U$5.P15 17.87,61.93 17.87,63.02 18.25,63.5 19.45,63.75 19.84,64.23 19.88,65.5
  Top 1.016: 19.88,65.02 19.88,65.5 19.88,71.79 19.77,71.9 U$6.P4
N$21
  Top 0.406: 15.12,65.5 15.12,65.2 15.28,65.04 15.28,63.19 15.27,63.18 U$5.P19
  Top 1.016: 15.12,65.5 15.12,68.73 14.49,69.36 14.48,69.47 12.8,71.15 12.8,71.85 U$6.P2
N$23
  Top 0.254: U$7.P01 36.06,56.08 C11.2
N$24
  Top 0.406: 11.79,64.86 11.8,64.85 11.8,64.55 13.32,63.03 U$5.P22
  Top 1.016: 11.79,64.86 11.79,68.56 9.3,71.05 9.3,71.85 U$6.P1
N$27  (via drill 0.3)
  Top 0.203: R58.1 32.2,17.3 v32.58,17.62 | U$4.G 14.92,10.18 14.92,15.75 | 14.92,15.75 14.92,15.88 v15.72,16.68 | R1.1 14.54,16.14 14.92,15.75
  Bottom 0.203: 17.43,17.62 v32.58,17.62 | 16.85,17.62 16.68,17.62 v15.72,16.68
  Bottom 0.254: 16.85,17.62 17.43,17.62
N$28
  Top 0.254: U$11.P01 82.85,56.13 C23.2
N$29
  Top 0.203: U$13.P17 | U$13.P17 | 13.52,34.59 13.52,34.75 R29.2
  Top 0.406: U$13.P17 18.22,33.13 16.33,33.15 14.9,34.59 13.52,34.59
N$30
  Top 0.203: U$13.P20 18.58,31.19 18.57,31.2 | 13.68,30.03 13.72,30.03 R30.2
  Top 0.406: U$13.P20 18.57,31.2 16.07,31.2 14.9,30.03 13.68,30.03
N$31
  Top 0.254: U$11.P02 84.75,55.05 84.45,54.75 82.35,54.75 C23.1
N$33
  Top 0.254: U$13.P01 24.67,27.07 24.16,27.07 24.16,27.12 C29.2 | U$13.P01 | U$13.P01
N$34
  Top 0.203: U$1.MF1G 49.8,14.51 50.45,13.82 51.95,13.82 52.55,13.25 52.55,12.97 R59.2 52.98,11.74 R4.1
N$35
  Top 0.254: 26.06,27.07 26.07,27.07 | 26.06,27.07 26.07,27.07 | 26.06,27.07 26.05,27.08 | U$13.P02 25.68,29.22 26.2,28.7 26.2,27.27 C29.1 26.06,27.12 26.06,27.07 | U$13.P02 | U$13.P02
N$36
  Top 0.254: U$11.P03 85.4,55 84.05,53.65 81.36,53.65 C24.1
N$37
  Top 0.203: U$11.P07 88,57.1 88.2,57.3 89,57.3 89.3,57 89.3,56.13 U$11.P09 89.3,52.12 R28.1
N$38
  Top 0.254: U$9.P01 59.5,56.08 C17.2
N$39
  Top 0.254: U$11.P04 86.05,54.92 C27.1
N$40
  Top 0.254: U$9.P03 61.8,55.05 60.4,53.65 57.97,53.65 C18.1
N$41
  Top 0.406: U$11.P08 88.65,53.75 87.55,52.65 87.55,51.9 R26.1
N$43
  Top 0.406: U$9.P08 65.05,53.6 64,52.55 64,51.71 R21.1
N$44
  Top 0.203: 61.3,71.95 U$12.P2
  Top 0.406: 63.62,65.6 63.62,65.5 63.78,65.34 63.75,65.31 U$9.P19